# Altium PCB NUC970 DEV BOARD ADDON_RMII 20141215.PcbDoc
Units mil, origin at the board's own origin, x right, y up, seen from the top; angles counter-clockwise.
Board outline 1771.65 x 1181.1 mil, 4 copper layers (Top, 2-GND, 3-POWER, Bottom), stack 35.4 mil thick; 57 components, 51 nets, 200 pads, 132 vias.
Unrouted connection lines stored in the file: 1.
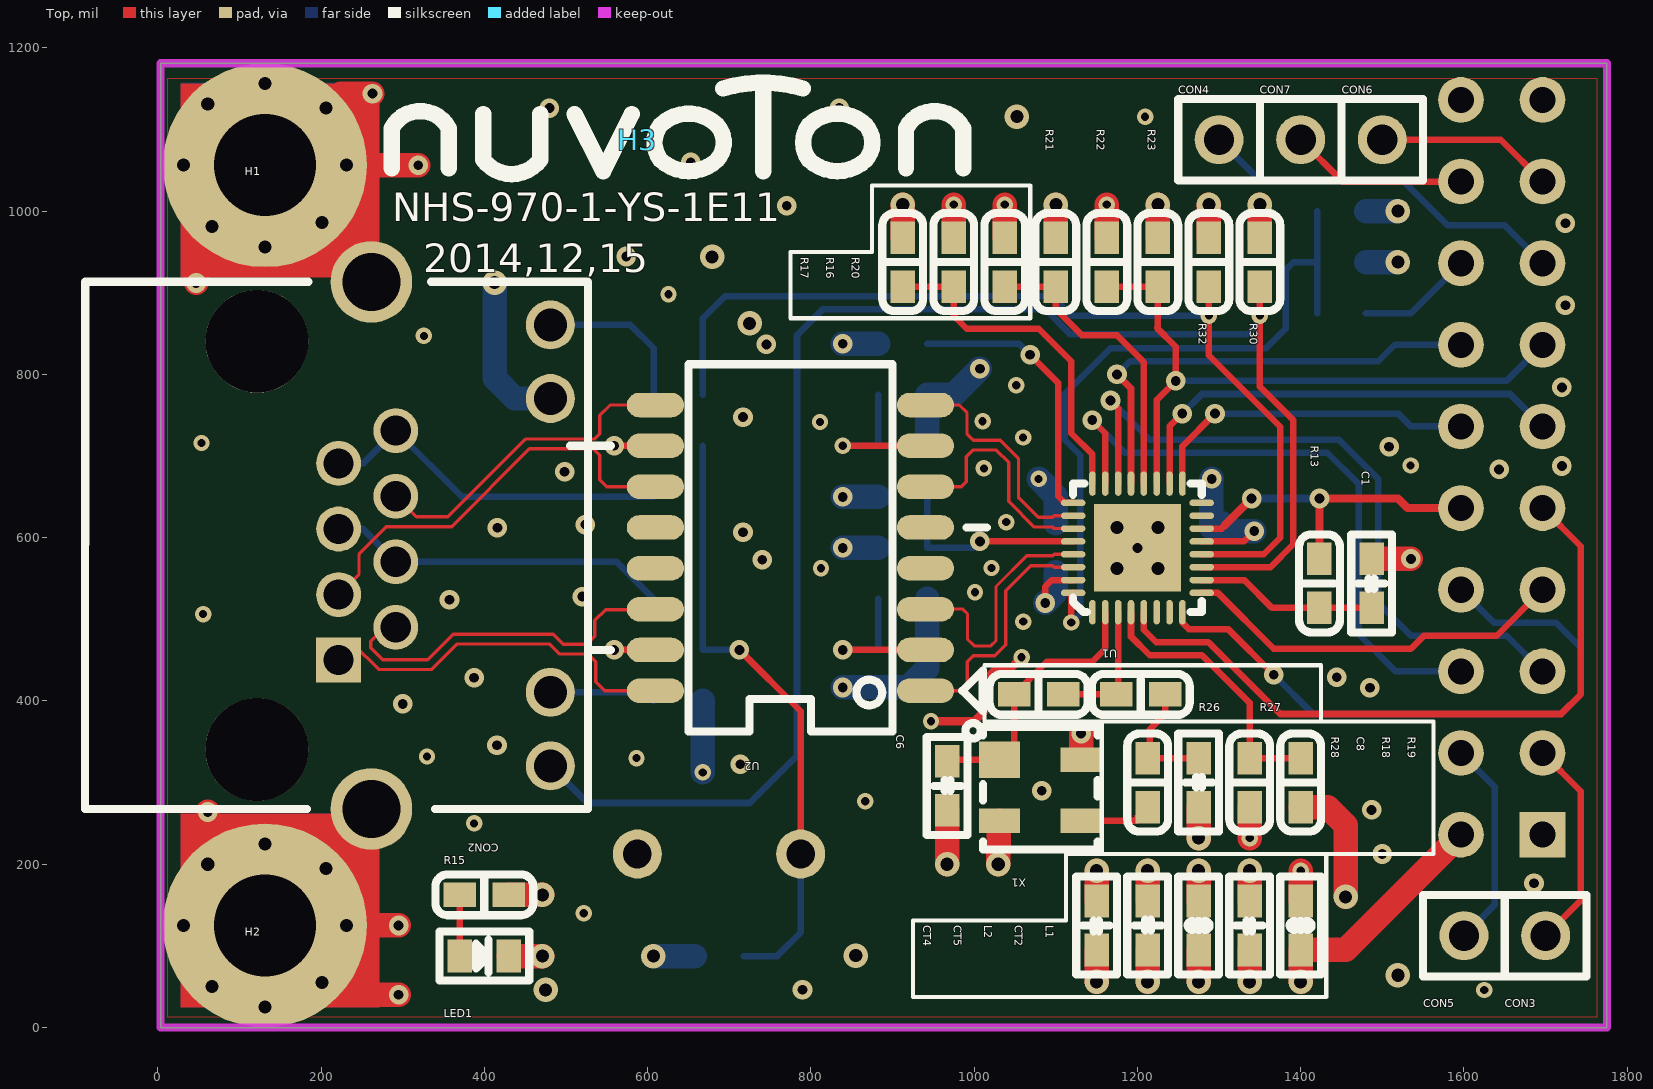
[diagram p0: Top view]
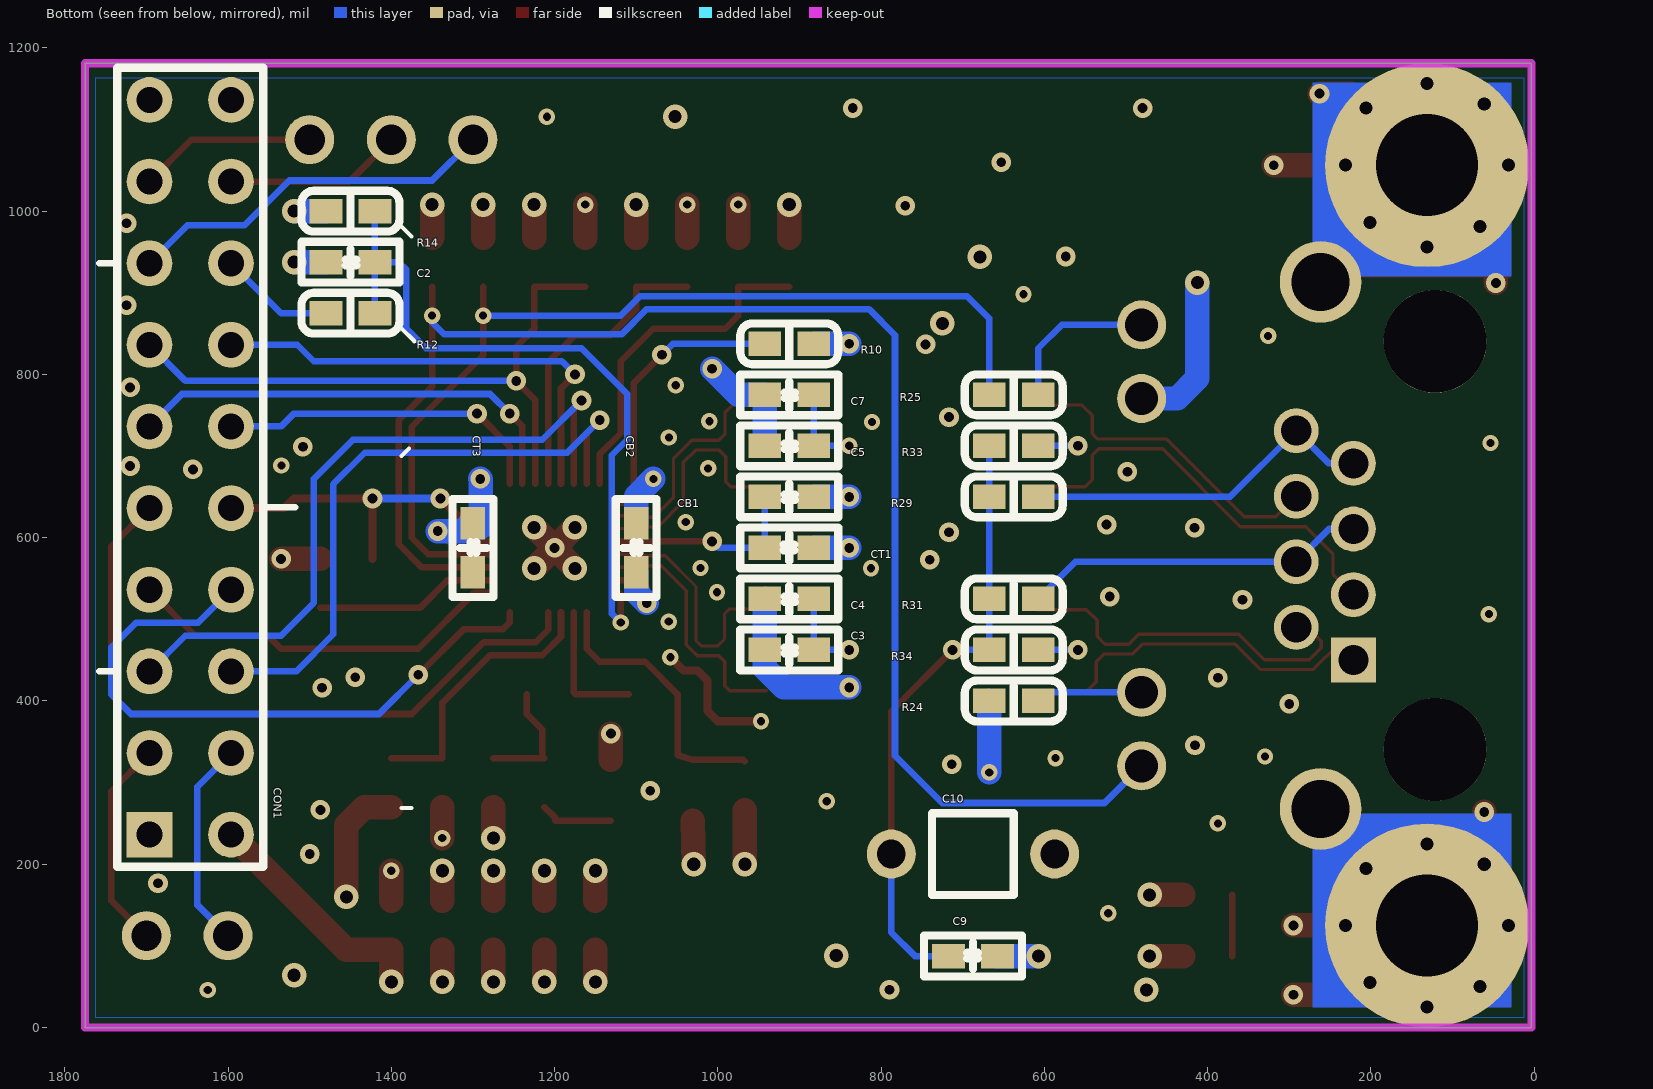
[diagram p1: Bottom view, seen from below]
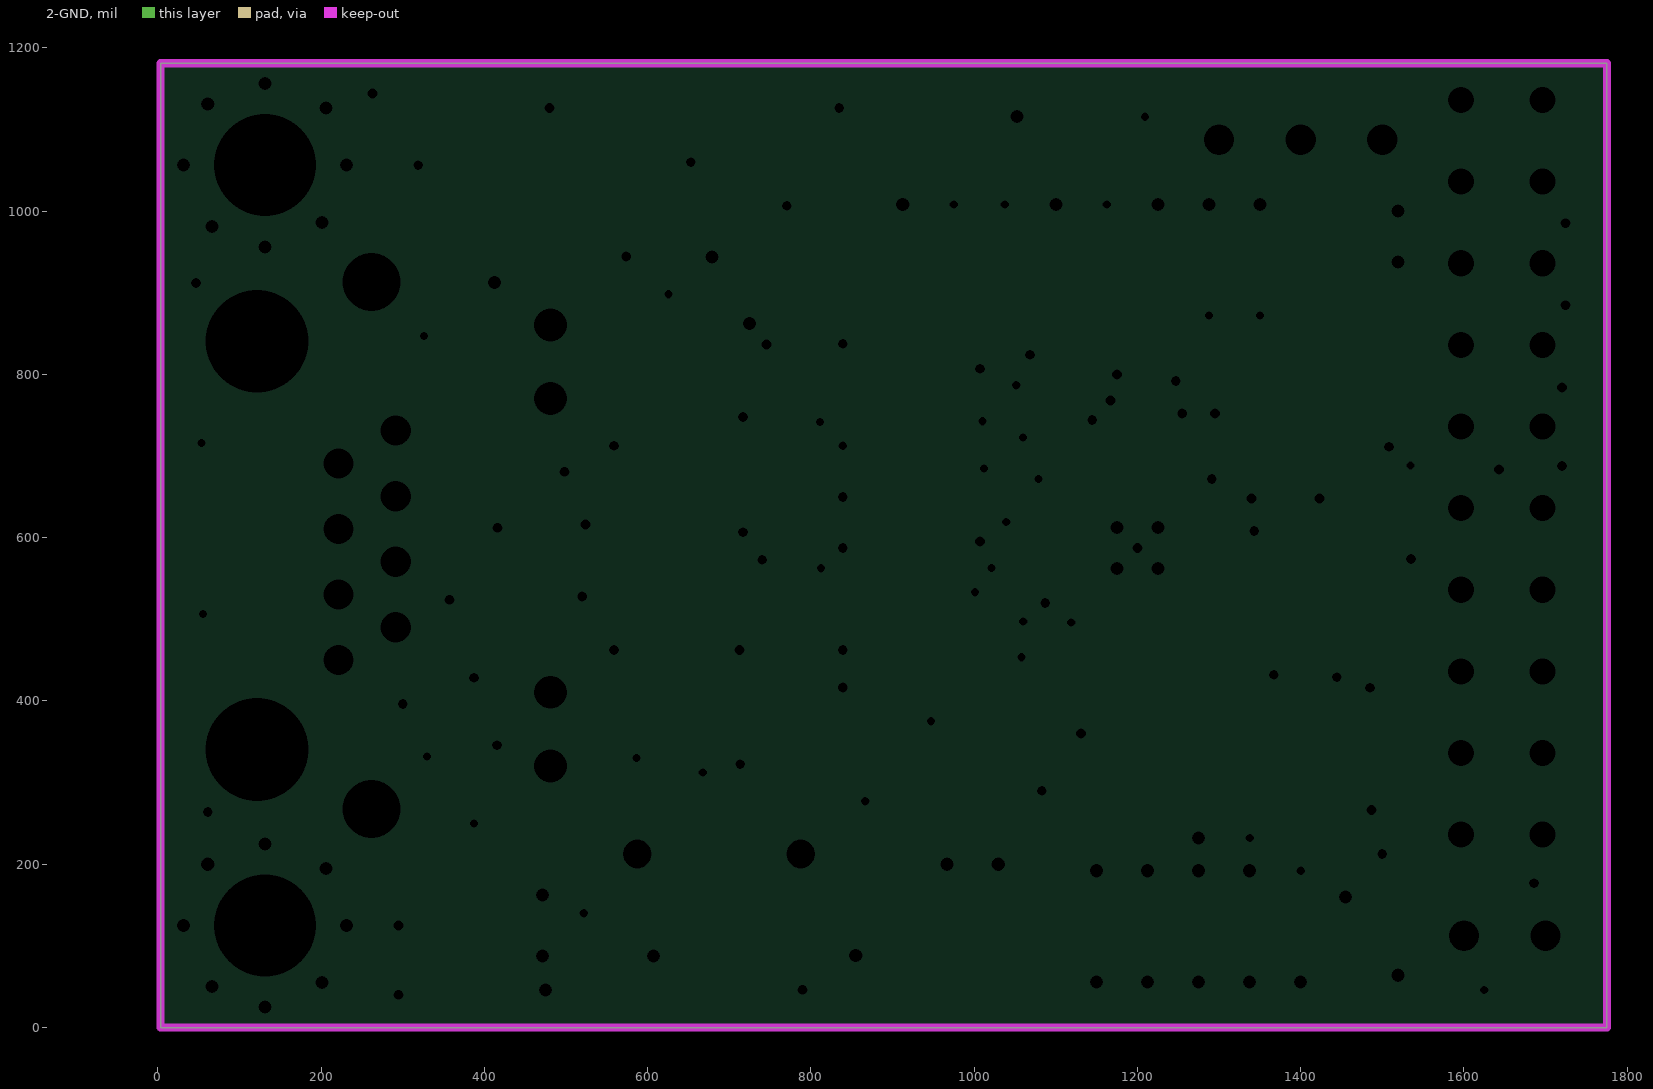
[diagram p2: 2-GND, clearances drawn from the general rule]
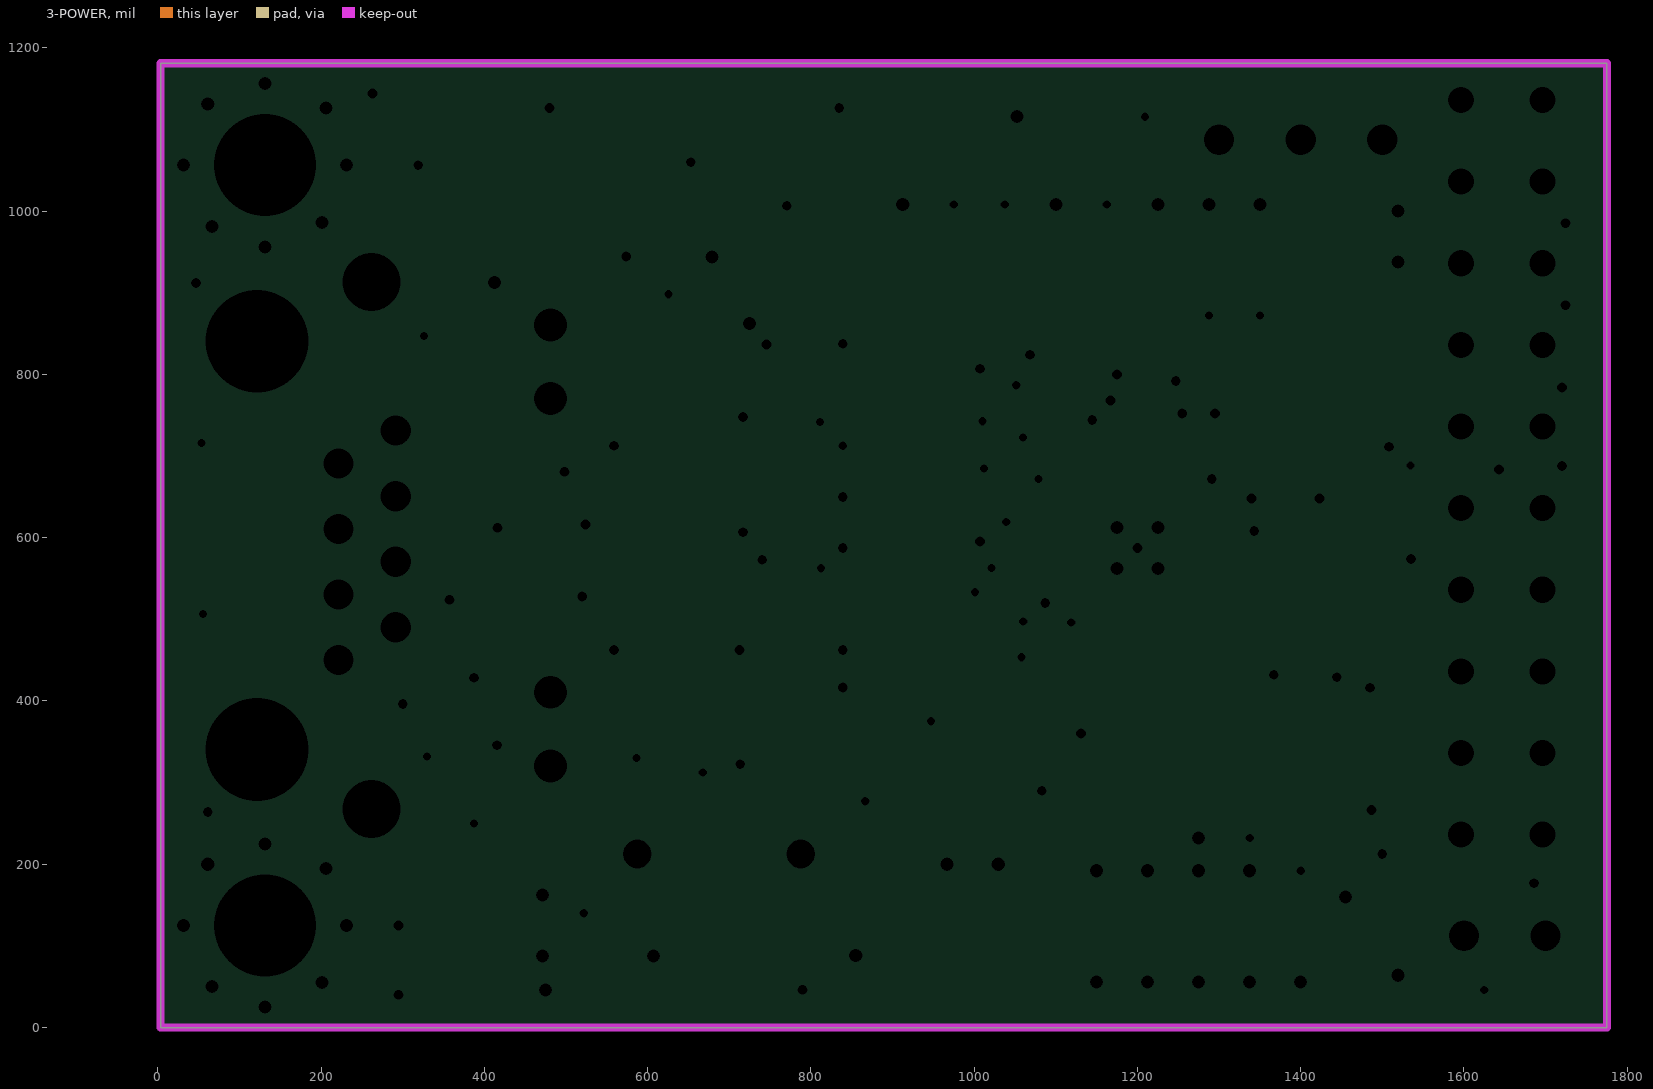
[diagram p3: 3-POWER, clearances drawn from the general rule]

## Layer stack, top to bottom
Solder Mask Top: solder mask 0.4, Solder Resist, Dk 3.5
Top: signal copper 1.35
Dielectric 1: dielectric 10, FR-4, Dk 4.3
2-GND: plane copper 1.35
Dielectric2: dielectric 10, FR-4, Dk 4.3
3-POWER: plane copper 1.35
Dielectric3: dielectric 10, FR-4, Dk 4.3
Bottom: signal copper 1.35
Solder Mask Bottom: solder mask 0.4, Solder Resist, Dk 3.5

## Board outline
3.35,1181.1 1775,1181.1 1775,0 3.35,0

## Design rules (kind name [scope] priority, off if disabled: settings)
Clearance "Clearance - NetClass - RJ45_100OHM_4/8/4" [InNetClass('RJ45_100OHM_4/8/4')] p1: gap=7 ignorepadtopadclearanceinfootprint=FALSE except(0: Arc-Hole Track-Hole SMDPad-Hole THPad-Hole Via-Hole Fill-Hole Poly-Hole Region-Hole Text-Hole; 8: Arc-Arc Arc-Track Track-Track; 10: Fill-Fill Fill-Poly Fill-Region Poly-Poly Poly-Region Region-Region Text-Text; 14: Arc-Fill Arc-Poly Arc-Region Track-Fill Track-Poly Track-Region SMDPad-Fill SMDPad-Poly SMDPad-Region THPad-Fill THPad-Poly THPad-Region Via-Fill Via-Poly Via-Region)
Clearance "Clearance - Default - DEFAULT- SMD" [IsVia vs IsSMTPin] p2: gap=6 ignorepadtopadclearanceinfootprint=FALSE
Clearance "Clearance - Default - DEFAULT - Via" [IsVia vs IsVia] p3: gap=6 ignorepadtopadclearanceinfootprint=FALSE
Clearance "Clearance - Default - DEFAULT - Net" [All] p4: gap=7 ignorepadtopadclearanceinfootprint=FALSE except(0: Arc-Hole Track-Hole SMDPad-Hole THPad-Hole Via-Hole Fill-Hole Poly-Hole Region-Hole Text-Hole; 10: Fill-Fill Fill-Poly Fill-Region Poly-Poly Poly-Region Region-Region Text-Text; 12: Arc-Fill Arc-Poly Arc-Region Track-Fill Track-Poly Track-Region SMDPad-Fill SMDPad-Poly SMDPad-Region THPad-Fill THPad-Poly THPad-Region Via-Fill Via-Poly Via-Region)
ComponentClearance "ComponentClearance - Default - DEFAULT" [All] p1: gap=6 collisioncheckmode=3 verticalgap=10 showdistances=FALSE
FanoutControl Fanout_SOIC [IsSOIC] p1: bgadir=Out bgaviamode=Centered fanoutstyle=Auto fanoutdirection=Alternating viagrid=1 // Fanout_SOIC (Default Rule)
FanoutControl Fanout_Small [(CompPinCount < 5)] p2: bgadir=Out bgaviamode=Centered fanoutstyle=Auto fanoutdirection=OutThenIn viagrid=1 // Fanout_Small (Default Rule)
FanoutControl Fanout_LCC [IsLCC] p3: bgadir=Out bgaviamode=Centered fanoutstyle=Auto fanoutdirection=Alternating viagrid=1 // Fanout_LCC (Default Rule)
FanoutControl Fanout_BGA [IsBGA] p4: bgadir=Out bgaviamode=Centered fanoutstyle=Auto fanoutdirection=Alternating viagrid=1 // Fanout_BGA (Default Rule)
HoleToHoleClearance "HoleToHoleClearance - Default - DEFAULT" [All] p1: gap=6 allowstackedmicrovias=TRUE
Length "Default Length" [All] p1: maxlimit=50000 minlimit=0
MaxMinImpedance "Default Impedance" [All] p1: minimum=50.00 maximum=150.0
ParallelSegment "Default Parallel Segment Adjasent" [All] p1: limit=1000 gap=200
ParallelSegment "Default Parallel Segment Same Layer" [All] p2: limit=1000 gap=200
PlaneConnect "Default PlaneConnect" [All] p1: planeconnectstyle=Relief reliefexpansion=20 reliefentries=0 reliefconductorwidth=15 reliefairgap=10
PolygonConnect "PolygonConnect - Default SMT" [IsSMTPin] p1: connectstyle=Relief reliefconductorwidth=10 reliefentries=4 polygonreliefangle="45 Angle" airgapwidth=10
PolygonConnect "PolygonConnect - Default Pad" [All] p2: connectstyle=Relief reliefconductorwidth=15 reliefentries=4 polygonreliefangle="45 Angle" airgapwidth=10
RoutingLayers "RoutingLayers - Default - DEFAULT" [All] p1: top layer_v5=TRUE bottom layer_v5=TRUE
RoutingPriority "RoutingPriority - Default - DEFAULT" [All] p1: routingpriority=3
RoutingTopology "Default Routing Topology" [All] p1: topology=Shortest
RoutingVias "RoutingVias - Default - DEFAULT" [All] p1: holewidth=12 width=24 viastyle="Through Hole" minholewidth=12 minwidth=24 maxholewidth=12 maxwidth=24
SMDToCorner "SMDToCorner - Default - DEFAULT" [All] p1: distance=60000
SolderMaskExpansion "SolderMaskExpansion from CAM settings" [All] p1: expansion=3
Width "Width - NetClass - RJ45_100OHM_4/8/4" [InNetClass('RJ45_100OHM_4/8/4')] p1: maxlimit=50 minlimit=1 preferedwidth=4
Width "Width - NetClass - 30MIL" [InNetClass('30MIL')] p2: maxlimit=50 minlimit=1 preferedwidth=30
Width "Default Width" [All] p3: maxlimit=50 minlimit=1 preferedwidth=8
18 further rules are at their usual default settings.

## Classes and differential pairs
net class RJ45_100OHM_4/8/4: MDI_RN MDI_RP MDI_TN MDI_TP RX+ RX- TX+ TX-
net class 30MIL: PHYAVD33 PHYIOVD33 VD33 VS

## Components (designator, comment, footprint, x,y, rotation, side; value= is the part's Value field where it differs from the comment)
C1 "C0603" C0603 1487,544 r90 top
C2 "C0603" C0603 1450,937.5 r0 bottom
C3 "C0603" C0603 912.5,462.5 r0 bottom
C4 "C0603" C0603 912.5,525 r0 bottom
C5 "C0603" C0603 912.5,712.5 r0 bottom
C6 "C0603" C0603 967,296 r270 top
C7 "C0603" C0603 912.5,775 r0 bottom
C8 "C0603" C0603 1275,300 r270 top
C9 "C0603" C0603 687.5,87.5 r180 bottom
C10 "CK05" CK05 687.5,212.5 r180 bottom
CB1 "C0603" C0603 912.5,650 r0 bottom
CB2 "C0603" C0603 1100,587.5 r270 bottom
CON1 "HEADER10X2-2.54MM" HEADER10X2-2.54MM 1696.26,236.22 r90 bottom
CON2 "RJ45-8P8C$2F$LED" RJ45-8P8C$2F$LED 121.46,590.55 r270 top
CON3 "HEADER1" HEADER1 1700,112.5 r0 top
CON4 "HEADER1" HEADER1 1300,1087.5 r0 top
CON5 "HEADER1" HEADER1 1600,112.5 r0 top
CON6 "HEADER1" HEADER1 1500,1087.5 r0 top
CON7 "HEADER1" HEADER1 1400,1087.5 r0 top
CT1 "C0603" C0603 912.5,587.5 r180 bottom
CT2 "C0603" C0603 1337.5,125 r90 top
CT3 "C0603" C0603 1300,587.5 r270 bottom
CT4 "C0603" C0603 1150,125 r90 top
CT5 "C0603" C0603 1212.5,125 r270 top
H1 "H-250" H-250 131.25,1056.25 r0 top
H2 "H-250" H-250 131.25,125 r0 top
H3 "LOGO-2" LOGO-2 587.5,1087.5 r0 top
L1 "L0603" L0603 1400,125 r90 top
L2 "L0603" L0603 1275,125 r90 top
LED1 "LED_0603" LED_0603 400,87.5 r0 top
R10 "R0603" R0603 912.5,837.5 r0 bottom
R12 "R0603" R0603 1450,875 r0 bottom
R13 "R0603" R0603 1423,544 r270 top
R14 "R0603" R0603 1450,1000 r180 bottom
R15 "R0603" R0603 400,162.5 r0 top
R16 "R0603" R0603 975,937.5 r90 top
R17 "R0603" R0603 912.5,937.5 r270 top
R18 "R0603" R0603 1337.5,300 r270 top
R19 "R0603" R0603 1400,300 r90 top
R20 "R0603" R0603 1037.5,937.5 r90 top
R21 "R0603" R0603 1100,937.5 r270 top
R22 "R0603" R0603 1162.5,937.5 r90 top
R23 "R0603" R0603 1225,937.5 r270 top
R24 "R0603" R0603 637.5,400 r180 bottom
R25 "R0603" R0603 637.5,775 r180 bottom
R26 "R0603" R0603 1079,408 r180 top
R27 "R0603" R0603 1204,408 r0 top
R28 "R0603" R0603 1212.5,300 r90 top
R29 "R0603" R0603 637.5,650 r180 bottom
R30 "R0603" R0603 1350,937.5 r270 top
R31 "R0603" R0603 637.5,525 r180 bottom
R32 "R0603" R0603 1287.5,937.5 r90 top
R33 "R0603" R0603 637.5,712.5 r180 bottom
R34 "R0603" R0603 637.5,462.5 r180 bottom
U1 "QFN32P-0.4X4M" QFN32P-0.4X4M 1200,587.5 r90 top
U2 "TS6121C" TS6121C 775,587.5 r90 top
X1 "SOT-143" SOT-143 1031,328 r270 top

## Footprints (in the part's own frame and the unit in brackets; to place one, negate y for a bottom-side part, rotate by r counter-clockwise, add the part's x,y. Pads: shape width x height; smd on the part's side, far side on the other; paste and mask are expansions set on the pad)
C0603 [mil]
  rect 40x30 smd: 1(-30,0) 2(30,0)
  silkscreen extent -60,-25 60,25
CK05 [mil]
  round 60 hole 35: 1(-100,0) 2(100,0)
  silkscreen extent -50,-50 50,50
H-250 [mil]
  round 250 / inner round 200 / far side round 250 hole 125 unplated: 1(0,0)
  round 40 hole 16: 2(-100,0) 3(100,0) 4(0,100) 5(0,-100) 6(-65,-75) 7(70,-70) 8(-70,75) 9(75,70)
HEADER1 [mil]
  round 60 hole 37: 1(0,0)
  silkscreen extent -50,-50 50,50
HEADER10X2-2.54MM [mil]
  rect 56x56 hole 32: 1(0,0)
  round 56 hole 32: 2(0,-100) 3(100,0) 4(100,-100) 5(200,0) 6(200,-100) 7(300,0) 8(300,-100) 9(400,0) 10(400,-100) 11(500,0) 12(500,-100) 13(600,0) 14(600,-100) 15(700,0) 16(700,-100) 17(800,0) 18(800,-100) 19(900,0) 20(900,-100)
  silkscreen extent -39,-179 939,61
L0603 [mil]
  rect 40x30 smd: 1(-30,0) 2(30,0)
  silkscreen extent -60,-25 60,25
LED_0603 [mil]
  rect 30x40 smd: 1(-30,0) 2(30,0)
  silkscreen extent -55,-30 55,30
LOGO-2 [mil]
  silkscreen extent -301,-42 399,70
QFN32P-0.4X4M [mil]
  oval 30x8 smd: 1(-78.74,55.12) 2(-78.74,39.37) 3(-78.74,23.62) 4(-78.74,7.87) 5(-78.74,-7.87) 6(-78.74,-23.62) 7(-78.74,-39.37) 8(-78.74,-55.12) 17(78.74,-55.12) 18(78.74,-39.37) 19(78.74,-23.62) 20(78.74,-7.87) 21(78.74,7.87) 22(78.74,23.62) 23(78.74,39.37) 24(78.74,55.12)
  oval 8x30 smd: 9(-55.12,-78.74) 10(-39.37,-78.74) 11(-23.62,-78.74) 12(-7.87,-78.74) 13(7.87,-78.74) 14(23.62,-78.74) 15(39.37,-78.74) 16(55.12,-78.74) 25(55.12,78.74) 26(39.37,78.74) 27(23.62,78.74) 28(7.87,78.74) 29(-7.87,78.74) 30(-23.62,78.74) 31(-39.37,78.74) 32(-55.12,78.74)
  rect 107x107 smd: 33(0,0)
  silkscreen extent -79,-79 79,79
R0603 [mil]
  rect 40x30 smd: 1(-30,0) 2(30,0)
  silkscreen extent -60,-25 60,25
RJ45-8P8C$2F$LED [mm]
  rect 1.397x1.397 / inner round 1.397 / far side rect 1.397x1.397 hole 0.94: 1(3.57,2.54)
  round 1.397 hole 0.94: 2(2.55,4.32) 3(1.53,2.54) 4(0.51,4.32) 5(-0.51,2.54) 6(-1.53,4.32) 7(-2.55,2.54) 8(-3.57,4.32)
  round 1.524 hole 1.02: 9(6.86,9.13) 10(4.57,9.13) 11(-4.57,9.13) 12(-6.86,9.13)
  round 2.54 hole 1.8: 13(8.2,3.56) 14(-8.2,3.56)
  round 3.2 hole 3.2 unplated: 15(6.35,0) 16(-6.35,0)
  silkscreen extent -8.21,-5.34 8.21,10.3
SOT-143 [mil]
  rect 45x50 smd: 1(0,0)
  rect 30x50 smd: 2(74.8,0) 3(74.8,100) 4(0,100)
  silkscreen extent -45,-42 110,120
TS6121C [mil]
  oval 30x70 smd: 1(-175,-165.5) 2(-125,-165.5) 3(-75,-165.5) 4(-25,-165.5) 5(25,-165.5) 6(75,-165.5) 7(125,-165.5) 8(175,-165.5) 9(175,165.5) 10(125,165.5) 11(75,165.5) 12(25,165.5) 13(-25,165.5) 14(-75,165.5) 15(-125,165.5) 16(-175,165.5)
  silkscreen extent -225,-240 225,270

## Via types
v1: diameter 24, hole 12, Top to Bottom, 63 vias
v2: diameter 20, hole 10, Top to Bottom, 35 vias
v3: diameter 30, hole 16, Top to Bottom, 34 vias

## Nets (pads, with @x,y where several pads share a name; then routed paths per layer and width w, separated by ;. In a path a pad name is that pad's centre, name@x,y a point inside that pad or via, vN(x,y) a via of type N, cw(c..) or ccw(c..) an arc to the next point about the centre after c; other vN are vias at no path point)
50MCLKI: C1.1 R13.2 U1.10 | length 222.4
  Top w8: U1.10 1330.87,548.13 1365,514 R13.2 C1.1
COL: R18.1 R19.2 U1.4 | length 339
  Top w8: U1.4 1192.13,478.87 1215,456 1279,456 1337.5,397.5 R18.1 R19.2
CRS: R20.1 R21.2 U1.20 | length 373.6
  Top w8: R20.1 R21.2 1100,880 1132,848 1175,848 1207.87,815.13 U1.20
ENRST: C2.1 R12.1 R14.2 U1.32 | length 872.8
  Top w8: v2(1119,496) 1119,530.12 U1.32
  Bottom w8: v2(1119,496) 1130,507 1130,701 1111,720 1111,776 1167,832 1357.5,832 1381.5,856 1381.5,928 1391,937.5 C2.1 ; R12.1 C2.1 ; R14.2 C2.1
ETHX0: R26.1 R27.1 U1.3 | length 166.7
  Top w8: R26.1 R27.1 1176.38,410.38 U1.3
ETHX1: C6.1 R26.2 U1.2 X1.1 | length 337.7
  Top w8: C6.1 969,328 X1.1 1049,333.5 R26.2 1089,448 1144.63,448 1160.63,464 U1.2
MDI_RN: U1.26 U2.8 | length 281.5
  Top w4: U2.8 981.64,762.5 991.36,752.78 991.36,726.85 991.62,726.85 999.17,719.3 1032.02,719.3 1054.24,697.09 1054.24,649.52 1078.76,625 1096.39,625 1098.26,626.87 U1.26
MDI_RP: U1.27 U2.6 | length 285.3
  Top w4: U2.6 984.13,662.5 989.77,668.14 990.34,668.14 990.34,699.37 998.27,707.3 1027.05,707.3 1042.24,692.12 1042.24,644.55 1073.79,613 1096.39,613 1098.26,611.12 U1.27
MDI_TN: U1.29 U2.3 | length 302.9
  Top w4: U2.3 985.97,512.5 991.86,506.6 991.86,475.75 1000.18,467.43 1020.37,467.43 1026.76,473.82 1026.76,540.21 1064.3,577.75 1096.39,577.75 1098.26,579.63 U1.29
MDI_TP: U1.30 U2.1 | length 301.3
  Top w4: U2.1 985.52,412.5 991.53,418.52 991.53,448.18 998.79,455.43 1025.34,455.43 1038.76,468.85 1038.76,535.24 1069.27,565.75 1096.39,565.75 1098.26,563.88 U1.30
N16777927: R33.2 U2.10 | length 99
  Top w8: v1(559,712.5) U2.10
  Bottom w8: v1(559,712.5) R33.2
N16777929: C9.1 C10.1 R29.1 R31.1 R33.1 R34.1 | length 754.1
  Top w8: v1(712.5,462.5) 787.5,387.5 C10.1
  Bottom w8: R33.1 R29.1 R31.1 R34.1 v1(712.5,462.5) ; C9.1 758.5,87.5 787.5,116.5 C10.1
N16777958: R34.2 U2.15 | length 99
  Top w8: v1(559,462.5) U2.15
  Bottom w8: v1(559,462.5) R34.2
N16777963: CON2.7 CON2.8 R29.2 | length 436.3
  Bottom w8: CON2.7 251.38,690.94 CON2.8 372.64,650 R29.2
N16777971: CON2.4 CON2.5 R31.2 | length 421.5
  Bottom w8: CON2.5 251.38,610.63 CON2.4 562.03,570.47 R31.2
N16778059: CON2.10 R24.2 | length 131
  Bottom w8: CON2.10 596.87,410.63 R24.2
N16778075: CON2.12 R25.2 | length 195.5
  Bottom w8: CON2.12 578.87,860.63 607.5,832 R25.2
N16778534: C3.1 C4.1 U2.2 | length 207.5
  Top w8: v1(839,462.5) U2.2
  Bottom w8: v1(839,462.5) C3.1 C4.1
N16778621: C5.1 C7.1 U2.7 | length 207.5
  Top w8: v2(839,712.5) U2.7
  Bottom w8: v2(839,712.5) C5.1 C7.1
N16778858: C8.1 R27.2 R28.2 | length 149.4
  Top w8: R27.2 1234,384 1215,365 1215,332.5 R28.2 C8.1
N16778888: R28.1 X1.3 | length 90.4
  Top w8: X1.3 1199,253.2 1199,256.5 R28.1
N16778997: R10.2 U1.25 | length 340.8
  Top w8: v1(1068.5,824) 1103,789.5 1103,650.62 1111,642.62 U1.25
  Bottom w8: R10.2 1055,837.5 v1(1068.5,824)
N168169960: LED1.1 R15.1 | length 75
  Top w8: LED1.1 R15.1
PE0: CON1.3 CON3.1 | length 260.9
  Top w8: CON1.3 1743,289.48 1743,155.5 CON3.1
PE1: CON1.4 CON5.1 | length 256.3
  Bottom w8: CON1.4 1637.5,294.98 1637.5,150 CON5.1
PE2: CON1.5 U1.22 | length 861.4
  Top w8: v1(1167,768) 1176.38,758.62 U1.22
  Bottom w8: v1(1167,768) 1215,720 1447,720 1495,672 1495,520 1535,480 1652.48,480 CON1.5
PE3: CON1.6 U1.23 | length 771.3
  Top w8: v1(1144.63,744) 1160.63,728 U1.23
  Bottom w8: v1(1144.63,744) 1184.63,704 1432.63,704 1471,665.63 1471,481.63 1516.41,436.22 CON1.6
PE4: CON1.7 U1.9 | length 475.8
  Top w8: U1.9 1298.62,532.38 1367,464 1535,464 1551,480 1640.04,480 CON1.7
PE5: CON1.8 U1.8 | length 790.6
  Top w8: U1.8 1255.12,495.88 1263,488 1311,488 v1(1367,432)
  Bottom w8: v1(1367,432) 1415,384 1719,384 1743,408 1743,465.45 1712.45,496 1636.48,496 CON1.8
PE6: CON1.9 U1.5 | length 857
  Top w8: U1.5 1207.87,487.13 1223,472 1287,472 1375,384 1719,384 1743,408 1743,589.48 CON1.9
PE7: CON1.10 R13.1 U1.14 | length 411.7
  Top w8: U1.14 1303,611.12 1306.88,615
  Top w10: 1306.88,615 v1(1339.88,648) ; R13.1 v1(1423,648) 1519,648 1530.78,636.22 CON1.10
  Bottom w10: v1(1339.88,648) v1(1423,648)
PE8: CON1.11 U1.18 | length 559.9
  Top w8: U1.18 1239.37,736.37 v1(1255,752)
  Bottom w8: v1(1255,752) 1279,776 1656.48,776 CON1.11
PE9: CON1.12 U1.17 | length 410.1
  Top w8: U1.17 1255.12,712.12 v1(1295,752)
  Bottom w8: v1(1295,752) 1519.22,752 1535,736.22 CON1.12
PE10: CON1.13 R22.1 R23.2 U1.19 | length 793.2
  Top w8: R22.1 R23.2@1223.07,907.5 ; U1.19 1223.62,768.62 v1(1247,792) 1247,834 1224.03,856.97 1225,857.93 R23.2 ; R23.2@1223.07,907.5 1223.62,906.94 R23.2 ; R23.2@1223.07,907.5 R23.2
  Bottom w8: v1(1247,792) 1652.04,792 CON1.13
PE11: CON1.14 U1.21 | length 577.1
  Top w8: v1(1175,800) 1192.13,782.87 U1.21
  Bottom w8: v1(1175,800) 1191,816 1495,816 1515.22,836.22 CON1.14
PE12: CON1.15 CON4.1 | length 458.9
  Bottom w8: CON4.1 1350,1037.5 1525,1037.5 1580.02,982.48 1650,982.48 CON1.15
PE13: CON1.16 R12.2 | length 141.6
  Bottom w8: R12.2 1535.04,875 CON1.16
PE14: CON1.17 CON6.1 | length 217.5
  Top w8: CON6.1 1644.98,1087.5 CON1.17
PE15: CON1.18 CON7.1 | length 217.5
  Top w8: CON7.1 1451.28,1036.22 CON1.18
PHYAD0: CON2.9 R30.2 U1.11 | length 1923.7
  Top w8: U1.11 1362.88,563.88 1391,592 1391,744 1350,785 v2(1350,872) R30.2
  Bottom w8: CON2.9 526.38,275 725,275 783,333 783,848 815,880 1087,880 1118,849 1335,849 1350,864 v2(1350,872)
PHYAD3: R25.1 R32.1 U1.12 | length 1183.3
  Top w8: U1.12 1354.63,579.63 1375,600 1375,736 1287.5,823.5 v2(1287.5,872) R32.1
  Bottom w8: R25.1 667.5,868.5 695,896 1095,896 1119,872 v2(1287.5,872)
PHYAVD33: CB2.2 CT5.1 L2.2 U1.31 | length 174.6
  Top w8: v1(1087,520) 1087,540.13 1095,548.13 U1.31
  Top w30: CT5.1 v3(1212.5,192) ; L2.2 v3(1275,192)
  Bottom w30: v1(1087,520) 1100,533 CB2.2
PHYIOVD33: CT3.1 L1.2 R16.2 R18.2 R20.2 R22.2 U1.13 | length 382.9
  Top w8: U1.13 1330.37,595.37 v1(1343,608)
  Top w30: R16.2 v2(975,1008) ; R20.2 v2(1037.5,1008) ; R22.2 v2(1162.5,1008) ; v2(1337.5,232) R18.2 ; L1.2 v2(1400,192)
  Bottom w30: v1(1291,672) 1290.56,671.56 1290.56,612.75 CT3.1 1303,617.5 1312.5,608 v1(1343,608)
PHYTEST: R16.1 R17.2 U1.24 | length 425.7
  Top w8: R17.2 R16.1 975,872 991,856 1079,856 1119,816 1119,728 1144.88,702.12 U1.24
REGOUT: CB1.2 CT1.1 U1.28 | length 244.6
  Top w8: v1(1007,595.37) U1.28
  Bottom w8: CB1.2 CT1.1 942.63,587.37 999,587.37 v1(1007,595.37)
RX+: CON2.3 U2.11 | length 513.2
  Top w4: CON2.3 246.56,555.42 246.56,580.08 279.96,613.48 313.16,613.48 313.22,613.54 360.06,613.54 455.29,708.76 533.64,708.76 541.24,701.17 541.24,671.04 549.77,662.5 U2.11
RX-: CON2.6 U2.9 | length 398.3
  Top w4: CON2.6 316.78,625.54 355.09,625.54 450.32,720.76 534.65,720.76 541.24,727.35 541.24,749.75 554,762.51 U2.9
TX+: CON2.1 U2.16 | length 459.2
  Top w4: CON2.1 240.25,468.79 270.43,438.61 335.49,438.61 366.7,469.82 479.44,469.82 491.68,457.57 526.66,457.57 536.39,447.84 536.39,423.55 547.44,412.5 U2.16
TX-: CON2.2 U2.14 | length 447.8
  Top w4: CON2.2 277.58,490.16 260.73,473.3 260.73,465.28 275.4,450.61 330.52,450.61 361.73,481.82 484.41,481.82 496.65,469.57 525.74,469.57 535.41,479.24 535.41,498.59 548.46,511.64 608.64,511.64 U2.14
VD33: CON1.1 CON1.2 CT2.1 CT4.1 L1.1 L2.1 R14.1 R15.2 R24.1 R30.1 | length 618.8
  Top w30: R15.2 v3(471,162.5) ; v3(1150,56) CT4.1 ; v3(1275,56) L2.1 ; v3(1337.5,56) CT2.1 ; R30.1 v3(1350,1008) ; v3(1400,56) L1.1 1455.04,95 CON1.2
  Bottom w30: v2(667.5,312.5) R24.1 ; R14.1 v3(1519,1000)
VS: C1.2 C2.2 C3.2 C4.2 C5.2 C6.2 C7.2 C8.2 C9.2 C10.2 CB1.1 CB2.1 CON1.19 CON1.20 CON2.11 CON2.13 CON2.14 CT1.2 CT2.2 CT3.2 CT4.2 CT5.2 H1.1 H1.2 H1.3 H1.4 H1.5 H1.6 H1.7 H1.8 H1.9 H2.1 H2.2 H2.3 H2.4 H2.5 H2.6 H2.7 H2.8 H2.9 LED1.2 R10.1 R17.1 R19.1 R21.1 R23.1 R32.2 U1.33 X1.2 X1.4 | length 2478.5
  Top w10: v2(947.12,375.04) 1000.04,375.04 1012.5,387.5 1012.5,425 1025,437.5 1042.05,437.5 v2(1058.15,453.6)
  Top w30: v1(47,912) 47,962 H1.6 ; H2.8 v1(61.25,264) ; H2.7 223,40 v1(295,40) ; H1.7 261.61,925.89 CON2.14 ; H2.9 259.25,248 259.25,265.35 CON2.13 ; H1.9 224,1144 v1(263,1144) ; H2.3 v1(295,125) ; H1.3 v1(319,1056.25) ; LED1.2 v3(471,87.5) ; R17.1 v3(912.5,1008) ; v3(967,200) C6.2 ; v3(1029.5,200) X1.2 ; R21.1 v3(1100,1008) ; X1.4 v1(1131,360) ; CT4.2 v3(1150,192) ; v3(1175,562.5) v1(1200,587.5) ; v3(1175,612.5) v1(1200,587.5) ; v3(1212.5,56) CT5.2 ; v3(1225,562.5) v1(1200,587.5) ; v3(1225,612.5) v1(1200,587.5) ; R23.1 v3(1225,1008) ; v3(1275,232) C8.2 ; R32.2 v3(1287.5,1008) ; CT2.2 v3(1337.5,192) ; R19.1 1433,270 1455,248 v3(1455,160) ; C1.2 v1(1535,574)
  Bottom w30: v3(412.5,912.5) 412.5,795.47 437.5,770.47 CON2.11 ; v3(607,87.5) C9.2 ; v1(839,416.5) 919,416.5 942.5,440 C3.2 C4.2 ; v1(839,587.5) CT1.2 ; v1(839,650) CB1.1 ; v1(839,837.5) R10.1 ; C5.2 C7.2 975,775 v1(1007,807) ; v2(1079,672) 1100,651 CB2.1 ; C2.2 v3(1519,937.5)
  other v1: 789.74,46.32 1685.74,176.77 1500,212.5 1486.86,266.58 1082.7,290.1 713.52,322.46 415.51,345.7 300.04,396.41 1484.72,416.27 387.44,428.35 1444.09,429.1 357.29,523.94 519.89,527.86 740.42,572.9 716.89,606.52 416.06,612.1 523.81,616.02 498.34,680.67 1642.97,683.57 1719.95,687.85 1508.25,711.37 716.89,747.71 1719.95,784.08 745.46,836.8 1724.23,884.58 573.76,944.46 1724.23,985.09 770.49,1006.47 652.88,1059.94 479.66,1126.23 834.64,1126.23
  other v2: 1624.8,45.94 521.85,139.97 387.5,250 866.64,277.1 586.5,330 329.86,331.96 1060.18,497.14 55.6,506.31 1000.95,533.08 812.5,562.5 1021.2,562.95 1039.28,619.03 1011.94,684.84 1534.68,688.5 53.64,715.93 1060.03,722.81 811.23,741.64 1010.42,742.55 1051.53,786.68 325.95,847.19 625.68,898.12 1209.48,1115.58
  other v3: 475.04,46 1519,64 855,88 725,862.5 679,944 1052.27,1115.72
pads on no net: CON2.15 CON2.16 U1.1 U1.6 U1.7 U1.15 U1.16 U2.4 U2.5 U2.12 U2.13

## Polygon pours and split planes (outlines as drawn)
VS on Bottom (solid, remove dead copper, pour order 0): 12.5,1162.5 1762.5,1162.5 1762.5,12.5 12.5,12.5
VS on Top (solid, remove dead copper, pour order 2): 12.5,1162.5 1762.5,1162.5 1762.5,12.5 12.5,12.5
VS on 2-GND (split plane): 1760.94,14.06 17.41,14.06 17.41,1167.04 1760.94,1167.04
PHYIOVD33 on 3-POWER (split plane): 1195.92,1148.31 1195.92,725 1196.23,723.44 1197.12,722.12 1209.62,709.62 1210.28,709.17 1210.94,708.73 1212.5,708.42 1423.31,708.42 1433.42,698.31 1433.42,151.69 1423.31,141.58 1326.69,141.58 1316.58,151.69 1316.58,562.5 1316.27,564.06 1315.83,564.72 1315.38,565.38 1302.88,577.88 1301.56,578.77 1300,579.08 951.69,579.08 941.58,589.19 941.58,1148.31 951.69,1158.42 1185.81,1158.42
PHYAVD33 on 3-POWER (split plane): 1295.92,548.31 1295.92,151.69 1285.81,141.58 951.69,141.58 941.58,151.69 941.58,548.31 951.69,558.42 1285.81,558.42
VD33 on 3-POWER (split plane): 1759.44,1148.73 1759.44,26.27 1748.73,15.56 26.27,15.56 15.56,26.27 15.56,1148.73 26.27,1159.44 911.23,1159.44 921.94,1148.73 921.94,137.5 922.17,136.33 922.84,135.34 935.34,122.84 936.33,122.17 937.5,121.94 1437.5,121.94 1438.67,122.17 1439.66,122.84 1452.16,135.34 1452.83,136.33 1453.06,137.5 1453.06,712.5 1452.83,713.67 1452.16,714.66 1439.66,727.16 1438.67,727.83 1437.5,728.06 1226.27,728.06 1215.56,738.77 1215.56,1148.73 1226.27,1159.44 1748.73,1159.44

## Keep-outs
Keep-Out Layer:
  the board outline again, w10

## Other copper
Top:
  region net VS: 28,1156 271,1156 271,919 28,919 28,1156
  region net VS: 28,262 271,262 271,25 28,25 28,262
  text "ARTWORK-TOP" at 1330,-905 h50
Bottom:
  region net VS: 28,262 271,262 271,25 28,25 28,262
  region net VS: 28,1157 271,1157 271,920 28,920 28,1157
  text "ARTWORK-BTM" at 1930,-905 h50
2-GND (plane layer: these items are gaps in the copper):
  region: 1775,0 3.35,0 3.35,1181.1 1775,1181.1 hole: 1764,1170.1 14.35,1170.1 14.35,11 1764,11
  region: 28,262 271,262 271,25 28,25 28,262
  region: 28,1156 271,1156 271,919 28,919 28,1156
  region: 28,261 271,261 271,24 28,24 28,261
  lines w6: 14.35,11 1764,11 1764,1170.1 14.35,1170.1 14.35,11
  text "LAYER 2" at 1455,-905 h50
3-POWER (plane layer: these items are gaps in the copper):
  region: 1775,0 3.35,0 3.35,1181.1 1775,1181.1 hole: 1187.5,1162.5 950,1162.5 937.5,1150 937.5,587.5 950,575 1300,575 1312.5,562.5 1312.5,150 1325,137.5 1425,137.5 1437.5,150 1437.5,700 1425,712.5 1212.5,712.5 1200,725 1200,1150 hole: 1287.5,562.5 950,562.5 937.5,550 937.5,150 950,137.5 1287.5,137.5 1300,150 1300,550 hole: 1750,1162.5 1225,1162.5 1212.5,1150 1212.5,737.5 1225,725 1437.5,725 1450,712.5 1450,137.5 1437.5,125 937.5,125 925,137.5 925,1150 912.5,1162.5 25,1162.5 12.5,1150 12.5,25 25,12.5 1750,12.5 1762.5,25 1762.5,1150
  lines w6: 12.5,25 25,12.5 1750,12.5 1762.5,25 1762.5,1150 1750,1162.5 1225,1162.5 1212.5,1150 1212.5,737.5 1225,725 1437.5,725 1450,712.5 1450,137.5 1437.5,125 937.5,125 925,137.5 925,1150 912.5,1162.5 25,1162.5 12.5,1150 12.5,25
  lines w8: 937.5,150 950,137.5 1287.5,137.5 1300,150 1300,550 1287.5,562.5 950,562.5 937.5,550 937.5,150 ; 937.5,587.5 950,575 1300,575 1312.5,562.5 1312.5,150 1325,137.5 1425,137.5 1437.5,150 1437.5,700 1425,712.5 1212.5,712.5 1200,725 1200,1150 1187.5,1162.5 950,1162.5 937.5,1150 937.5,587.5
  text "LAYER 3" at 1455,-905 h50
Multi-Layer:
  lines w10: 622.5,-1098.23 622.5,-653.23 ; 622.5,-950 2100,-950 ; 622.5,-800 2100,-800 ; 1175,-1095 1175,-655 ; 1665,-1095 1665,-950 ; 2100,-1100 2100,4025 -4800,4025 -4800,-1100 2100,-1100 ; 2100,-1100 2100,-650 -505,-650 -505,-1100 2100,-1100
  text "NUC970 DEV BOARD ADDON_RMII" at 1187.5,-712.5 h30
  text "蔼ひм()そ" at -305,-745 h50
  text "JOB NAME" at 675,-762.5 h50
  text "20141215" at 1837.5,-775 h30
  text "Gao-Fu Technology Corp." at -420,-855 h50
  text "LAYER" at 762.5,-912.5 h50
  text "http://www.gaofu.com.tw" at -315,-955 h40
  text "4 LAYER" at 1705,-1060 h50
  text "DATE" at 787.5,-1062.5 h50
  text "20141215" at 1225,-1062.5 h50
  text "886-3-6682475" at -160,-1065 h40

## Silkscreen, mask and mechanical layers (free items; w line width, h text height)
Silkscreen Top:
  lines w5: 775,868.75 1068.75,868.75 1068.75,1031.25 875,1031.25 875,950 775,950 775,868.75 ; 925,37.5 925,131.25 1112.5,131.25 1112.5,212.5 1431.25,212.5 1431.25,37.5 925,37.5 ; 1012.5,375 1012.5,443.75 1425,443.75 1425,375 1012.5,375 ; 1156.25,212.5 1156.25,375 1562.5,375 1562.5,212.5 1156.25,212.5
  text "NHS-970-1-YS-1E11" at 287.5,987.5 h35
  text "2014,12,15" at 325,925 h35
  text "SILKSCREEN-TOP" at 1280,-905 h50
Silkscreen Bottom:
  lines w5: 1371.88,840.62 1387.5,856.25 ; 1375,268.75 1387.5,268.75 ; 1375,968.75 1387.5,981.25 ; 1378.12,709.38 1387.5,700
  text "SILKSCREEN-BTM" at 1980,-905 h50
Paste Mask Top:
  text "SMD Paste Mask-TOP" at 1280,-905 h40
Paste Mask Bottom:
  text "SMD Paste Mask-BTM" at 1280,-905 h40
Solder Mask Top:
  text "SOLDER MASK-TOP" at 1230,-905 h50
Solder Mask Bottom:
  region: 1147.5,640 1255,640 1255,535 1147.5,535 1147.5,640
  text "SOLDER MASK-BTM" at 2030,-905 h50
Assembly Drawing Bottom:
  text "Evonne" at -475,-1075 h50
Drill Drawing:
  lines w1: 3.35,1181.1 3.37,1181.1 ; 1775,0 1775.03,0 ; 1775,1181.1 1775.03,1181.1 1775,1181.1
  lines w6: 485.5,2612.5 925,2612.5 925,2712.5 485.5,2712.5 485.5,2612.5
  lines w8: 188,1625 1337.5,1625 ; 188,1750 1337.5,1750 ; 425,1625 800,1525 ; 425,1862.5 1087.5,1862.5 ; 425,1963.5 425,1525 800,1625 1087.5,1525 1087.5,1963.5 ; 800,1862.5 800,1525 ; 1087.5,1625 800,1525 ; 188,1525 188,1963.5 1337.5,1963.5 1337.5,1525 188,1525
  lines w10: 3.35,1231.1 3.35,1309.84 ; 701.22,1259.84 3.35,1259.84 ; 1077.13,1259.84 1775,1259.84 ; 1775,1231.1 1775,1309.84 ; 1825,0 1903.74,0 ; 1825,1181.1 1903.74,1181.1 ; 1853.74,442.44 1853.74,0 ; 1853.74,813.8 1853.74,1181.1 ; 3.35,1259.84 103.35,1234.84 103.35,1284.84 3.35,1259.84 ; 1775,1259.84 1675,1284.84 1675,1234.84 1775,1259.84 ; 1853.74,0 1878.74,100 1828.74,100 1853.74,0 ; 1853.74,1181.1 1828.74,1081.1 1878.74,1081.1 1853.74,1181.1
  text "4 Layers PCB stack-up" at 257.25,3155.5 h35
  text "---------------------soldermask" at 250,3012.5 h35
  text "Top S---------------------1OZ(plated to 1.7mil)" at 75,2900 h35
  text "p.p.=3.5mil" at 575,2825 h35
  text "L2 G---------------------1OZ" at 112.5,2737.5 h35
  text "Core=47.5mil" at 513,2638.5 h35
  text "L3 P---------------------1OZ" at 112.5,2550 h35
  text "p.p=3.5mil" at 600,2475 h35
  text "Bottom S---------------------1OZ(plated to 1.7mil)" at -37.5,2400 h35
  text "---------------------soldermask" at 250,2287.5 h35
  text "PCB total thickness is 1.6mm" at 287.5,2137.5 h35
  text "PCB material:FR-4" at 287.5,2012.5 h35
  text "Differential 100 ohm" at 475,1887.5 h35
  text "Layer" at 237.5,1850 h35
  text "Ref." at 1162.5,1837.5 h35
  text "Trace width" at 437.5,1787.5 h35
  text "Spacing" at 825,1787.5 h35
  text "Top" at 250,1662.5 h35
  text "4mil" at 550,1662.5 h35
  text "8mil" at 875,1662.5 h35
  text "Layer2" at 1125,1662.5 h35
  text "Bottom" at 212.5,1550 h35
  text "Layer3" at 1125,1550 h35
  text "45.0mm" at 731.22,1222.34 h50
  text "30.0mm" at 1893.11,472.44 h50 r90
  text "DRILL DRAWING" at 1330,-905 h50